# EAGLE board Test (EAGLE 7.7.0)
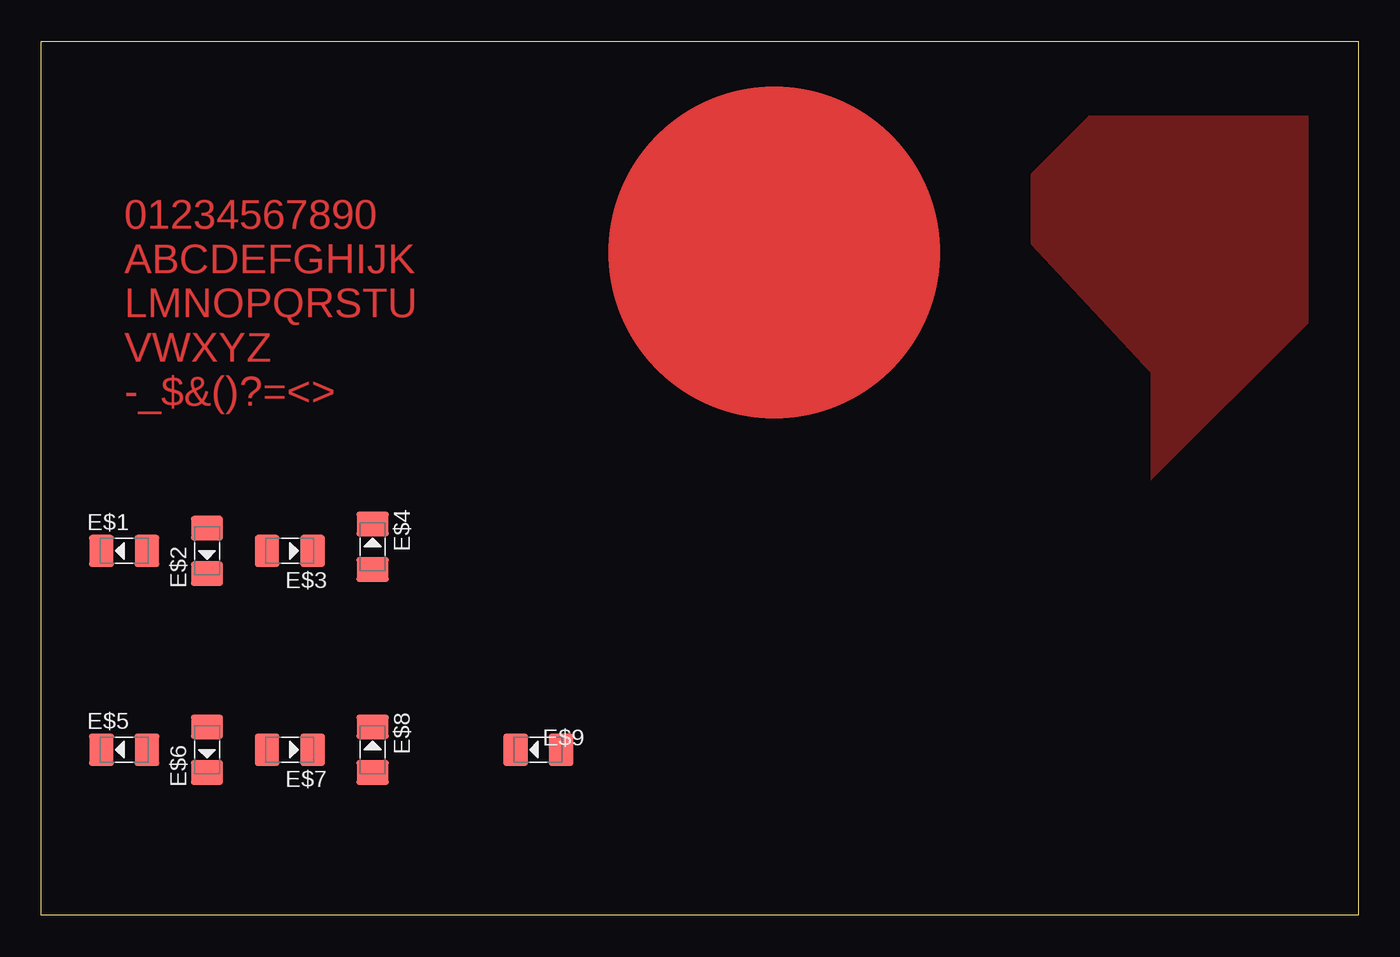
[diagram p0: board, top side]
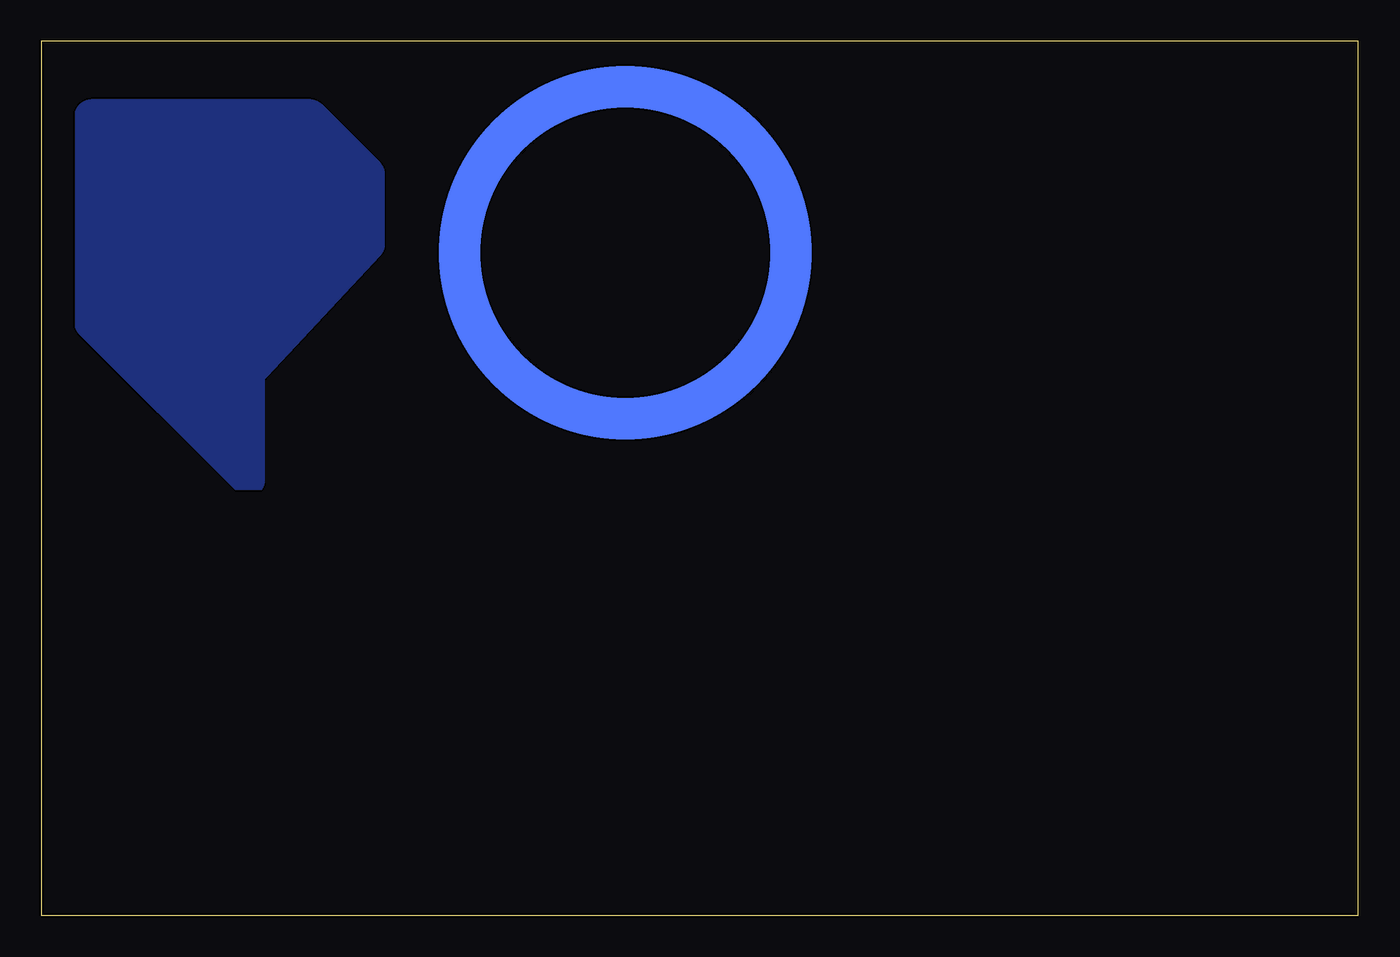
[diagram p1: board, bottom side, seen from below]

Size 79.5 x 52.75 mm. Coordinates in mm from the lower left corner, seen from the top.
Outline: 0,0 0,52.75 79.5,52.75 79.5,0 0,0
Copper layers (1*16): Top 0.035mm / dielectric 1.5mm / Bottom 0.035mm
Design rules "default": minimum track width 10mil, minimum drill 24mil, track to track 8mil, track to pad 8mil, pad to pad 8mil, via to via 8mil, smd to smd 8mil, copper to edge 40mil, drill to drill 8mil, minimum pad ring 10mil, minimum via ring 8mil, stop-mask expansion 4mil, vias tented up to drill 0mil, thermal gap 10mil

## Footprints (pad centres in the part's own frame; a part is rotated, then mirrored left to right if it is on the bottom)
C-SMC-A = smd 1.5 x 1.95: + -1.375,0; - 1.375,0

## Placement (x,y rotation side)
E$1  [C-SMC-A]  5,22 0 top
E$2  [C-SMC-A]  10,22 90 top
E$3  [C-SMC-A]  15,22 180 top
E$4  [C-SMC-A]  20,22.25 270 top
E$5  [C-SMC-A]  5,10 0 top
E$6  [C-SMC-A]  10,10 90 top
E$7  [C-SMC-A]  15,10 180 top
E$8  [C-SMC-A]  20,10 270 top
E$9  [C-SMC-A]  30,10 0 top

## Library data of the parts
E$1-E$9 = smd-parts

## Tracks (layer width: path | path; a pad name or v marks a point on that pad's centre or on a via)
S$1
  pour Top: 63.25,48.25 76.5,48.25 76.5,35.75 67,26.25 67,32.75 59.75,40.5 59.75,44.75
  pour Bottom: 59.75,40.5 59.75,44.75 63.25,48.25 76.5,48.25 76.5,35.75 67,26.25 67,32.75
(copper drawn outside any net)
  shapes: Bottom circle x1, Top circle x1

## Text on the board
Top: 01234567890 / ABCDEFGHIJK / LMNOPQRSTU / VWXYZ / -_$&()?=<>